# Altium PCB BAT_Simulator.PcbDoc
Units mm, origin at the board's own origin, x right, y up, seen from the top; angles counter-clockwise.
Board outline 95 x 100 mm, 2 copper layers (Top Layer, Bottom Layer); 23 components, 47 nets, 144 pads, 48 vias.
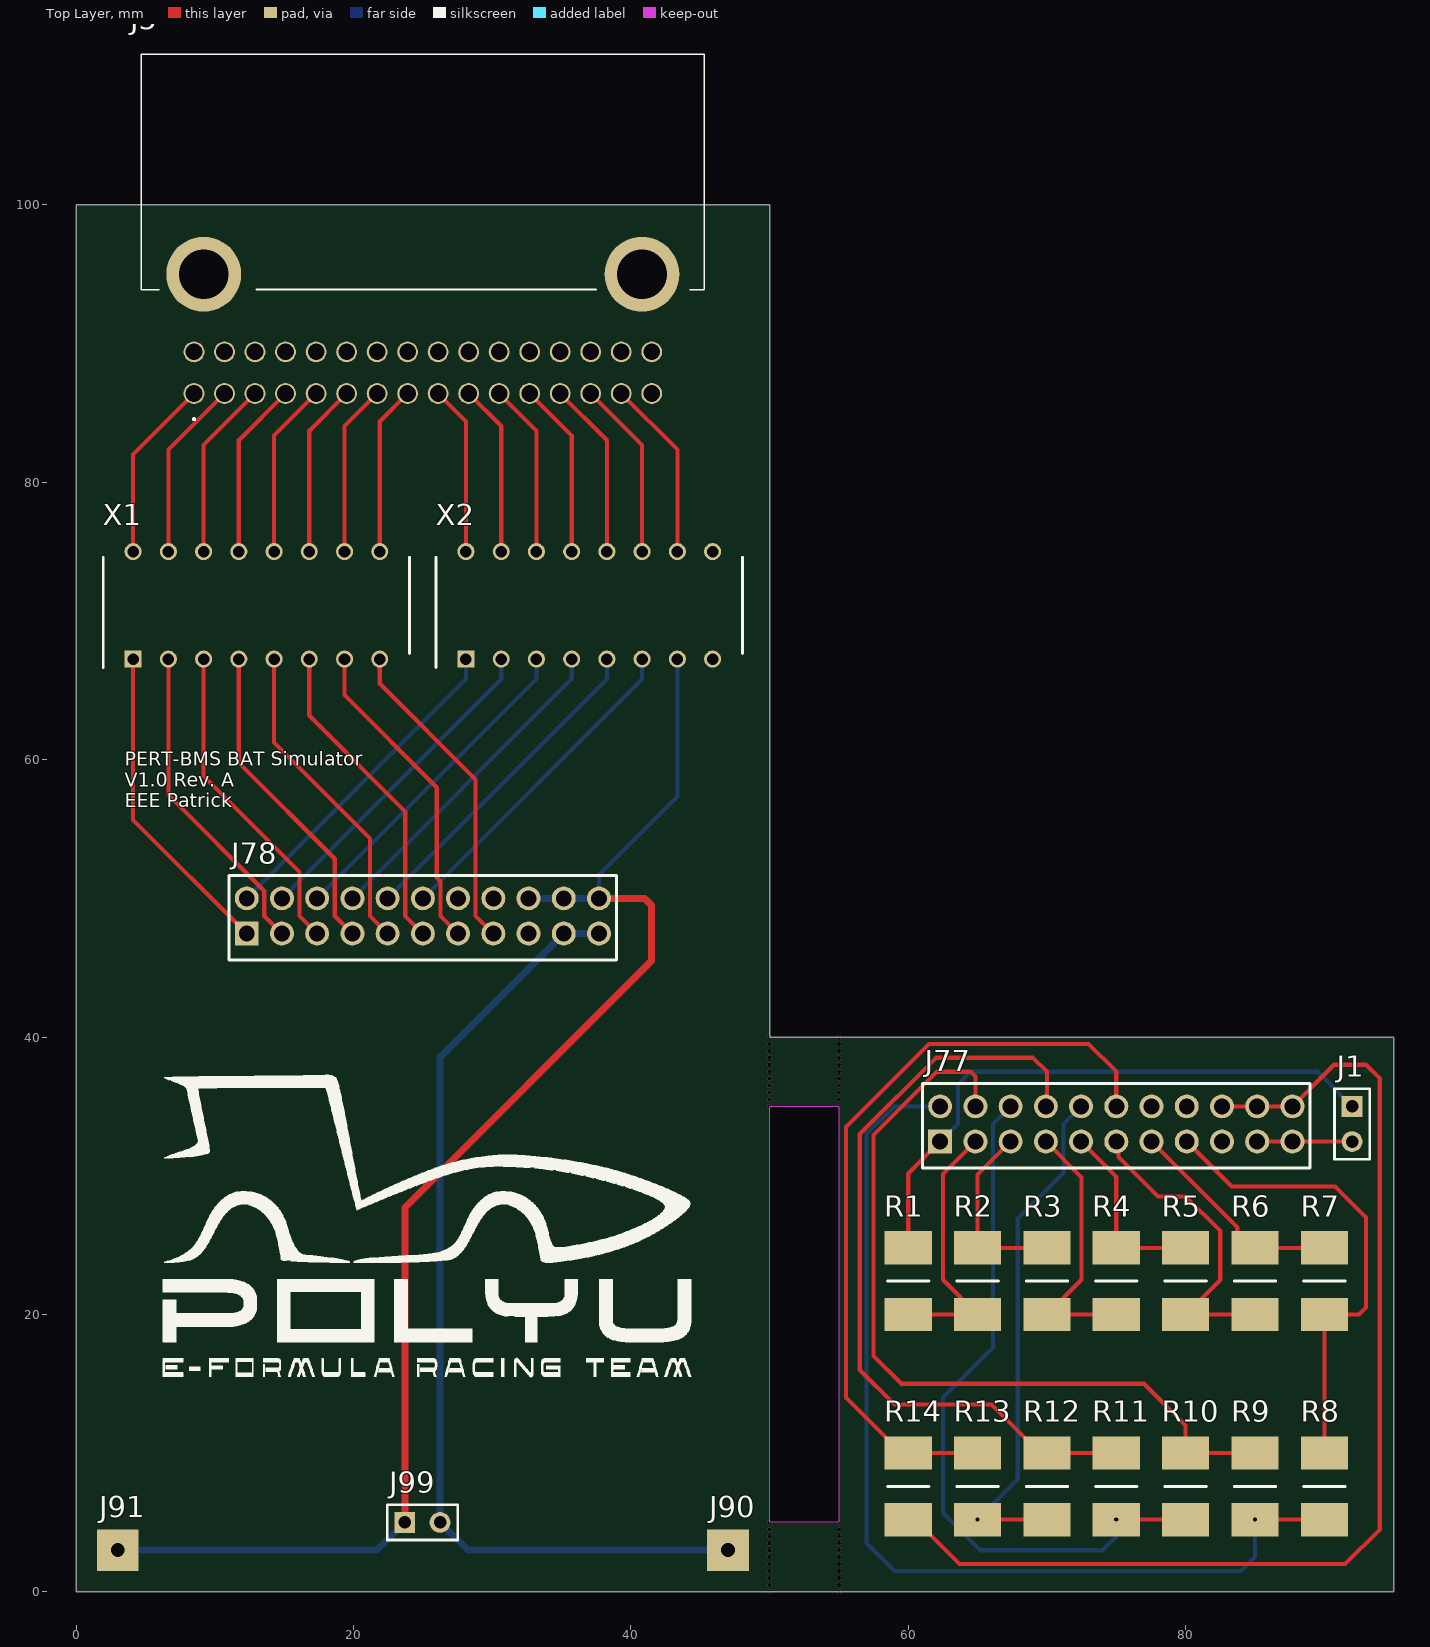
[diagram p0: Top Layer view]
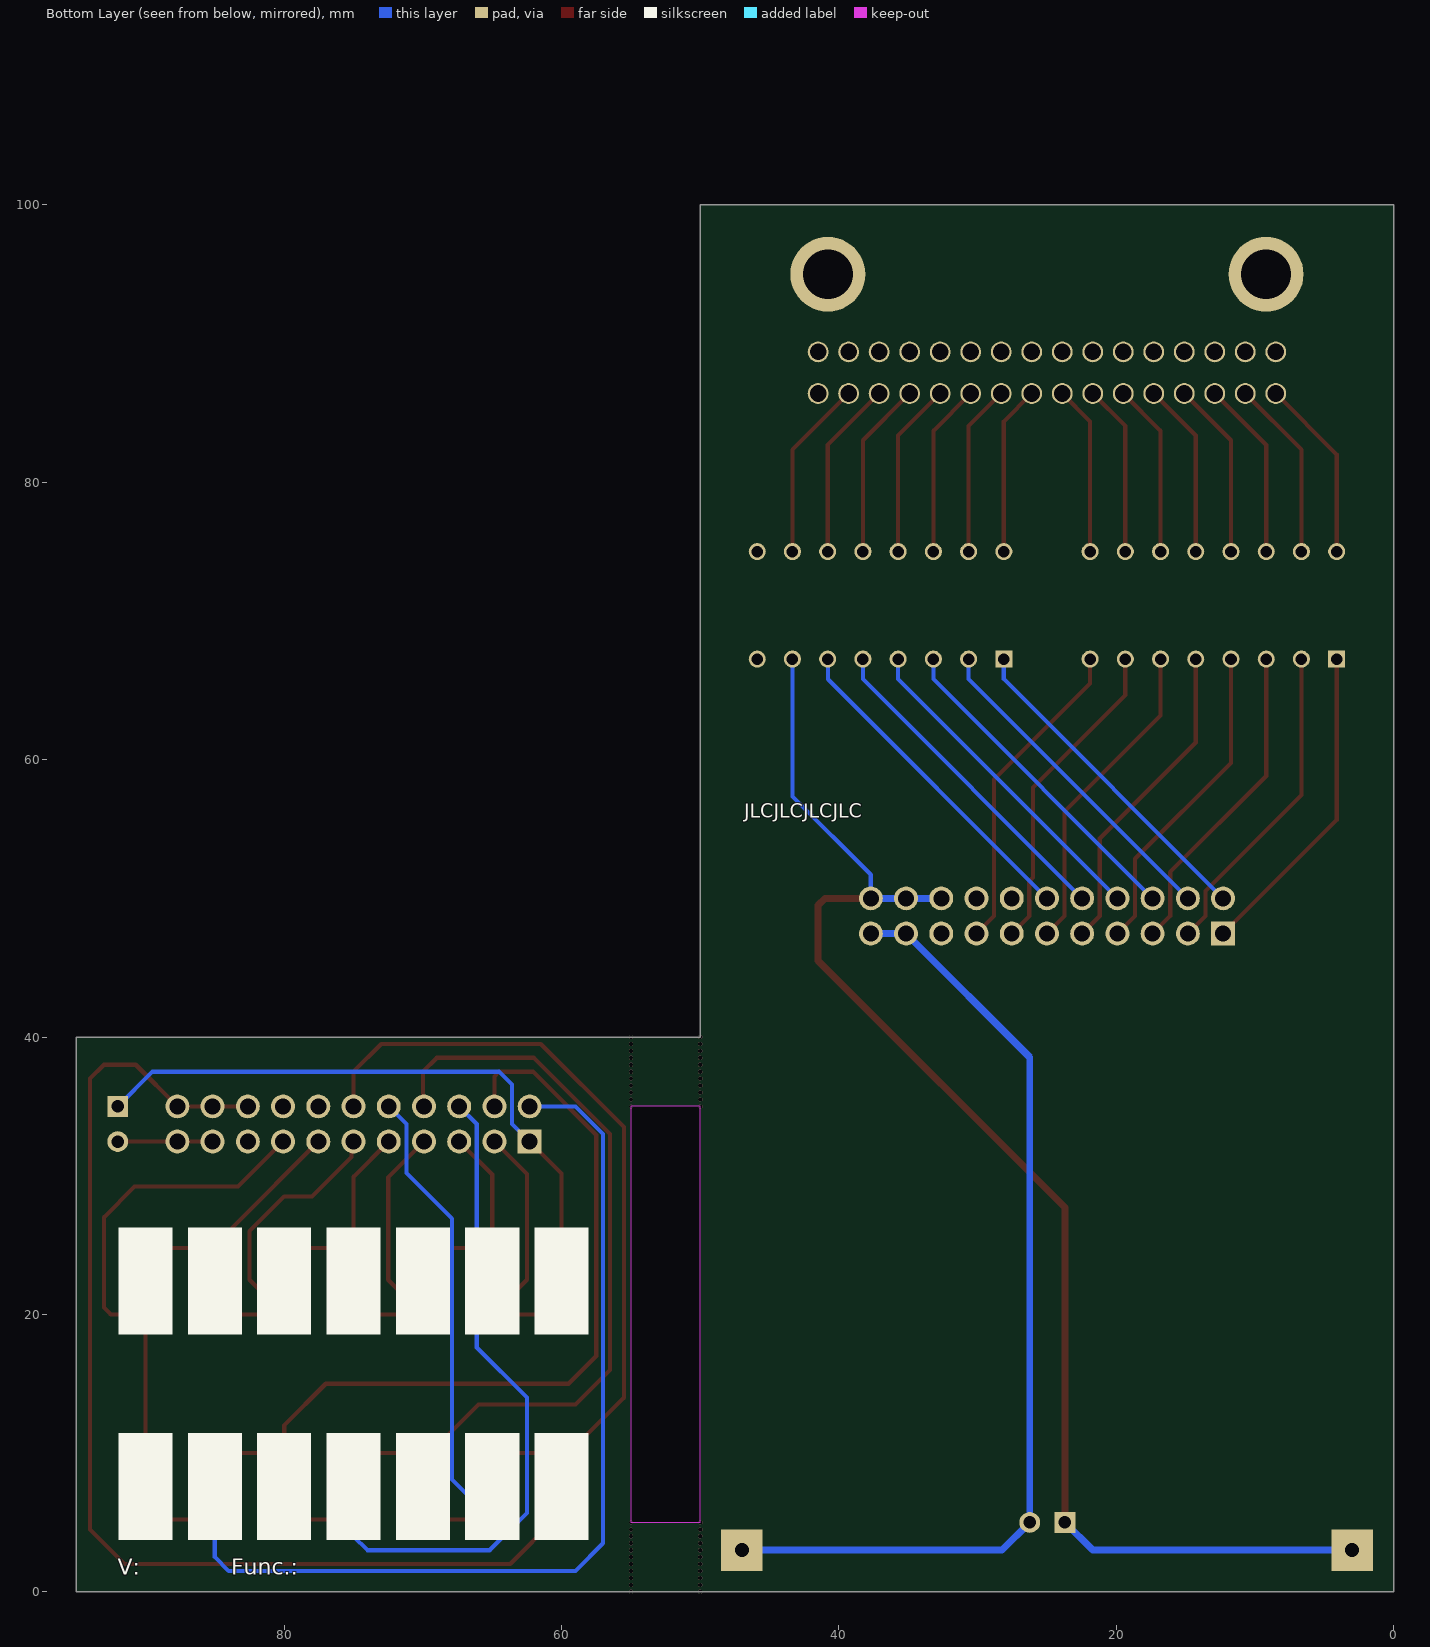
[diagram p1: Bottom Layer view, seen from below]
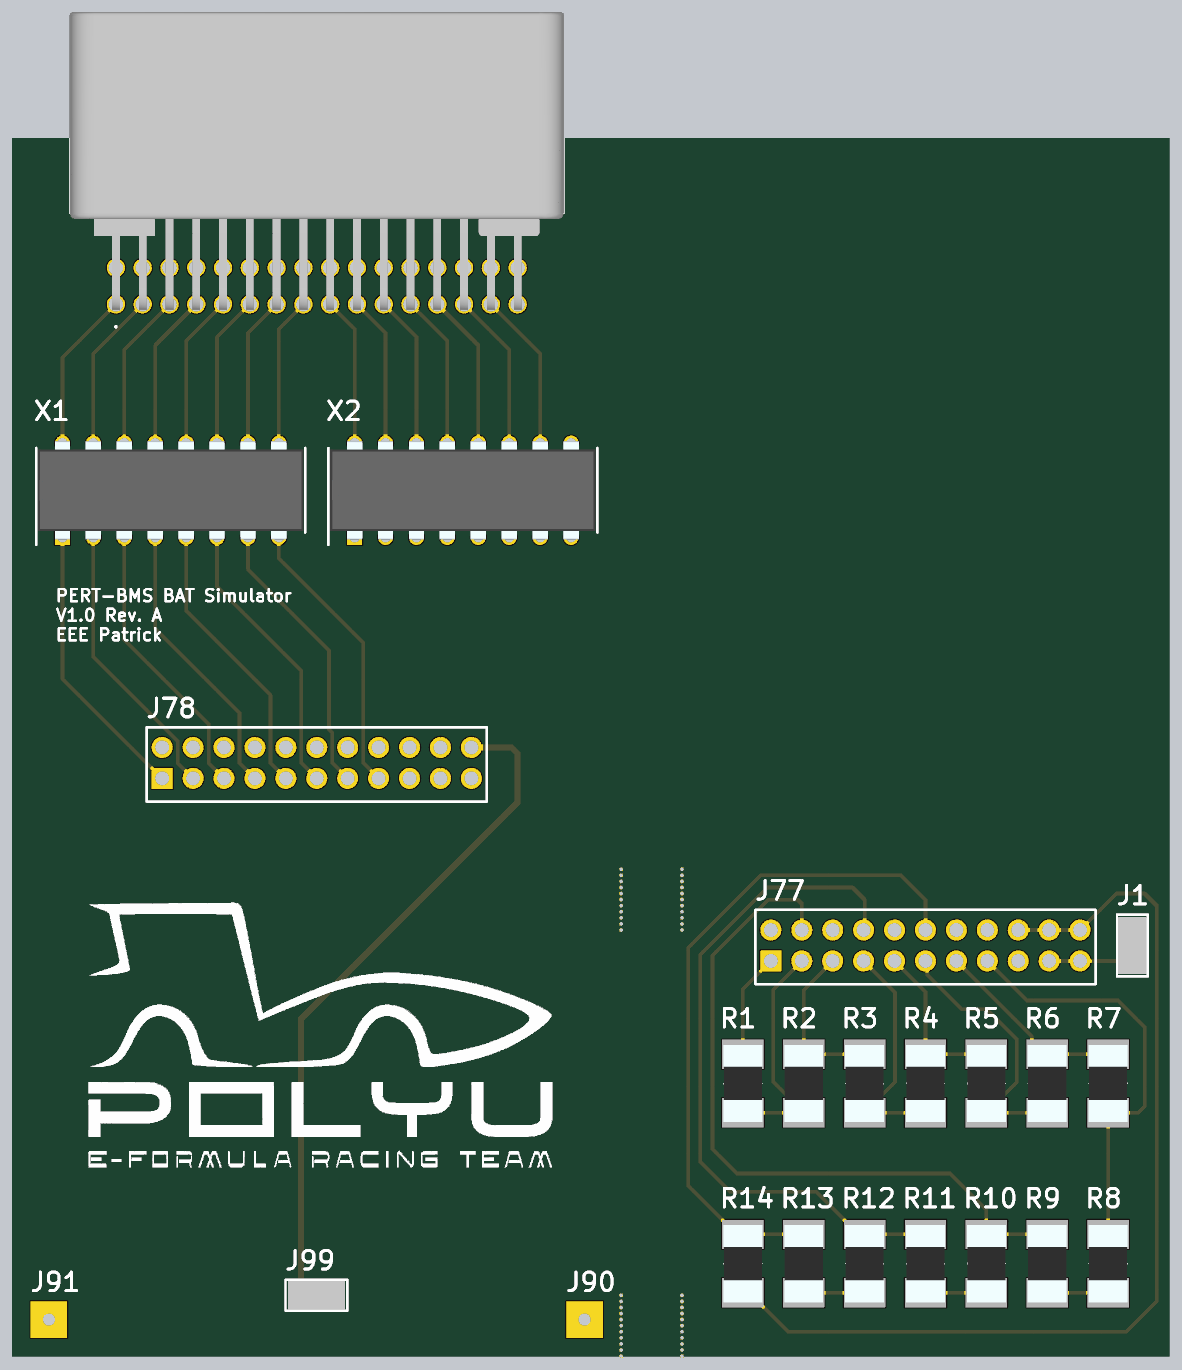
[diagram p2: 3D render of the assembled board from above, using the file's embedded part models]

## Layer stack, top to bottom
Top Solder: solder mask 0.0102, Solder Resist, Dk 3.5
Top Layer: signal copper 0.0356
Dielectric 1: dielectric 0.32, FR-4, Dk 4.8
Bottom Layer: signal copper 0.0356
Bottom Solder: solder mask 0.0102, Solder Resist, Dk 3.5

## Board outline
0,0 0,100 50,100 50,40 95,40 95,0
cut-out: 50,5 50,35 55,35 55,5

## Design rules (kind name [scope] priority, off if disabled: settings)
Clearance [All] p1: gap=0.254 ignorepadtopadclearanceinfootprint=FALSE except(0: Arc-Hole Track-Hole SMDPad-Hole THPad-Hole Via-Hole Fill-Hole Poly-Hole Region-Hole Text-Hole)
PolygonConnect [All] p1: connectstyle=Relief reliefconductorwidth=0.254 reliefentries=4 polygonreliefangle="90 Angle" airgapwidth=0.254
RoutingVias [All] p1: holewidth=0.711 width=1.27 viastyle="Through Hole" minholewidth=0.711 minwidth=1.27 maxholewidth=0.711 maxwidth=1.27
SolderMaskExpansion [All] p1: expansion=0.102 istentingtop=FALSE
Width [All] p1: maxlimit=1 minlimit=0.254 preferedwidth=0.254 minimp=50.000000 maximp=50.000000 favimp=50.000000
30 further rules are at their usual default settings.

## Components (designator, comment, footprint, x,y, rotation, side; value= is the part's Value field where it differs from the comment)
J1 "Short Plug" HDR_1X2_2.54_THD 92,35 r270 top
J5 "1318745-2" TH025_32P 8.5,86.4 r90 top
J77 "Header 1x5" HDR_2x11_2.54_THD 62.3,32.46 r90 top
J78 "Header 1x5" HDR_2x11_2.54_THD 12.3,47.46 r90 top
J90 "CastellatedHoles" CastellatedHole 47,3 r0 top
J91 "CastellatedHoles" CastellatedHole 3,3 r0 top
J99 "Header 1x2" HDR_1X2_2.54_THD 23.7,5 r0 top
R1 "100" 2512_SMD_R 60,22.4 r90 top
R2 "100" 2512_SMD_R 65,22.4 r90 top
R3 "100" 2512_SMD_R 70,22.4 r90 top
R4 "100" 2512_SMD_R 75,22.4 r90 top
R5 "100" 2512_SMD_R 80,22.4 r90 top
R6 "100" 2512_SMD_R 85,22.4 r90 top
R7 "100" 2512_SMD_R 90,22.4 r90 top
R8 "100" 2512_SMD_R 90,7.6 r270 top
R9 "100" 2512_SMD_R 85,7.6 r270 top
R10 "100" 2512_SMD_R 80,7.6 r270 top
R11 "100" 2512_SMD_R 75,7.6 r270 top
R12 "100" 2512_SMD_R 70,7.6 r270 top
R13 "100" 2512_SMD_R 65,7.6 r270 top
R14 "100" 2512_SMD_R 60,7.6 r270 top
X1 "210-8LPS" "DIP Switch 8Ch" 13,71.125 r90 top
X2 "210-8LPS" "DIP Switch 8Ch" 37,71.125 r90 top

## Footprints (in the part's own frame and the unit in brackets; to place one, negate y for a bottom-side part, rotate by r counter-clockwise, add the part's x,y. Pads: shape width x height; smd on the part's side, far side on the other; paste and mask are expansions set on the pad)
2512_SMD_R [mm]
  rect 2.4x3.4 smd: 1(-2.4,0) 2(2.4,0)
  silkscreen extent 0,-1.5 0,1.5, body extent -3.17,-1.6 3.17,1.6, height 1.2
CastellatedHole [mm]
  rect 3x3 / inner round 1.524 / far side rect 3x3 hole 1: 1(0,0)
"DIP Switch 8Ch" [mm]
  rect 1.23x1.23 / inner round 1.23 / far side rect 1.23x1.23 hole 0.83: 1(-3.875,8.89)
  round 1.23 hole 0.83: 2(-3.875,6.35) 3(-3.875,3.81) 4(-3.875,1.27) 5(-3.875,-1.27) 6(-3.875,-3.81) 7(-3.875,-6.35) 8(-3.875,-8.89) 9(3.875,-8.89) 10(3.875,-6.35) 11(3.875,-3.81) 12(3.875,-1.27) 13(3.875,1.27) 14(3.875,3.81) 15(3.875,6.35) 16(3.875,8.89)
  silkscreen extent -4.49,-11.04 3.47,11.04, body extent -4.03,-10.89 4.03,10.89, height 4.58
HDR_1X2_2.54_THD [mm] "Connector; Header; 2 Position"
  round 1.5 hole 0.9: 1(2.54,0)
  rect 1.5x1.5 hole 0.9: 2(0,0)
  silkscreen extent -1.27,-1.27 3.81,1.27, body extent -1.07,-1.17 3.61,1.17, height 10.38
HDR_2x11_2.54_THD [mm]
  rect 1.725x1.725 hole 1.15: 1(0,0)
  round 1.725 hole 1.15: 2(0,-2.54) 3(0,-5.08) 4(0,-7.62) 5(0,-10.16) 6(0,-12.7) 7(0,-15.24) 8(0,-17.78) 9(0,-20.32) 10(0,-22.86) 11(0,-25.4) 12(2.54,-25.4) 13(2.54,-22.86) 14(2.54,-20.32) 15(2.54,-17.78) 16(2.54,-15.24) 17(2.54,-12.7) 18(2.54,-10.16) 19(2.54,-7.62) 20(2.54,-5.08) 21(2.54,-2.54) 22(2.54,0)
  silkscreen extent -1.91,-26.67 4.19,1.27
TH025_32P [mm]
  round 1.5 hole 1.2: 1(0,0) 2(0,-2.2) 3(0,-4.4) 4(0,-6.6) 5(0,-8.8) 6(0,-11) 7(0,-13.2) 8(0,-15.4) 9(0,-17.6) 10(0,-19.8) 11(0,-22) 12(0,-24.2) 13(0,-26.4) 14(0,-28.6) 15(0,-30.8) 16(0,-33) 17(3,0) 18(3,-2.2) 19(3,-4.4) 20(3,-6.6) 21(3,-8.8) 22(3,-11) 23(3,-13.2) 24(3,-15.4) 25(3,-17.6) 26(3,-19.8) 27(3,-22) 28(3,-24.2) 29(3,-26.4) 30(3,-28.6) 31(3,-30.8) 32(3,-33)
  round 5.4 hole 3.6: MH1(8.6,-0.7) MH2(8.6,-32.3)
  silkscreen extent -1.9,-36.8 24.47,3.8, body extent -0.47,-36.8 24,3.8, height 15.6

## Part data
J1: library part Jumper, "Jumper for shorting two net"
J5: library part "TE TH/.25 32P TH", "TE CONNECTIVITY - 1318745-2 - Automotive Connector, TH 025 Series, Right Angle Plug, 32 Contacts, Crimp Pin", Manufacturer_Name="TE Connectivity", Mouser Part Number=571-1318745-2, Datasheet Link=https://www.te.com/commerce/DocumentDelivery/DDEController?Action=showdoc&DocId=Customer+Drawing%7F1318745%7FB6%7Fpdf%7FJapanese%7FJPN_CD_1318745_B6.pdf%7F1318745-2, Geometry.Height=15.5mm, Manufacturer_Part_Number=1318745-2, Mouser Price/Stock=https://www.mouser.co.uk/ProductDetail/TE-Connectivity-AMP/1318745-2?qs=ajJfoEgdyuQ%2FBs4LKkUxbA%3D%3D
J77 J78: library part "Header 2x11", "Header 2x11", Geometry.Height=10.745mm
J99: "Header, 2-Pin"
R1 R2 R3 R4 R5 R6 R7 R8 R9 R10 R11 R12 R13 R14: library part 2512_SMD_Resistor, "2512 SMD Resistor", Power Rating=3W, Tolerance=1%
X1 X2: library part "DIP Switch 8Ch", "DIP Switches / SIP Switches THROUGH HOLE, GOLD FLASH DIP SWITCH, 8-POLE, LOW PROFILE ACTUATOR, BOTTOM SEAL, TUBE PACK", Manufacturer_Name=CTS, Datasheet Link=https://datasheet.datasheetarchive.com/originals/dk/DKDS-29/575295.pdf, Geometry.Height=4.58mm, Manufacturer_Part_Number=210-8LPS

## Via types
v1: diameter 0.3, hole 0.3, Top Layer to Bottom Layer, 45 vias
v2: diameter 0.5, hole 0.3, Top Layer to Bottom Layer, tented both sides, 3 vias

## Nets (pads, with @x,y where several pads share a name; then routed paths per layer and width w, separated by ;. In a path a pad name is that pad's centre, name@x,y a point inside that pad or via, vN(x,y) a via of type N, cw(c..) or ccw(c..) an arc to the next point about the centre after c; other vN are vias at no path point)
GND: J77.12 J77.13 J77.14 R14.2 | length 81.9
  Top Layer w0.3: R14.2 60.5,5.2 63.7,2 91.5,2 94,4.5 94,37 93,38 90.7,38 J77.12 J77.13 J77.14
M0: J78.1 X1.1 | length 23.2
  Top Layer w0.3: X1.1 4.11,55.65 J78.1
M1: J78.2 X1.2 | length 23.2
  Top Layer w0.3: X1.2 6.65,57.441 13.567,50.525 13.567,48.733 J78.2
M2: J78.3 X1.3 | length 23.2
  Top Layer w0.3: X1.3 9.19,58.81 16.114,51.887 16.114,48.726 J78.3
M3: J78.4 X1.4 | length 23.2
  Top Layer w0.3: X1.4 11.73,59.77 18.647,52.854 18.647,48.733 J78.4
M4: J78.5 X1.5 | length 23.2
  Top Layer w0.3: X1.5 14.27,61.23 21.194,54.307 21.194,48.726 J78.5
M5: J78.6 X1.6 | length 23.2
  Top Layer w0.3: X1.6 16.81,63.19 23.727,56.274 23.727,48.733 J78.6
M6: J78.7 X1.7 | length 23.2
  Top Layer w0.3: X1.7 19.35,64.65 26,58 26,51.5 26.274,51.226 26.274,48.726 J78.7
M7: J78.8 X1.8 | length 23.2
  Top Layer w0.3: X1.8 21.89,65.493 28.807,58.577 28.807,48.733 J78.8
M8: J78.22 X2.1 | length 23.8
  Bottom Layer w0.3: J78.22 28.11,65.81 X2.1
M9: J78.21 X2.2 | length 23.8
  Bottom Layer w0.3: J78.21 30.65,65.81 X2.2
M10: J78.20 X2.3 | length 23.8
  Bottom Layer w0.3: J78.20 33.19,65.81 X2.3
M11: J78.19 X2.4 | length 23.8
  Bottom Layer w0.3: J78.19 35.73,65.81 X2.4
M12: J78.18 X2.5 | length 23.8
  Bottom Layer w0.3: J78.18 38.27,65.81 X2.5
M13: J78.17 X2.6 | length 23.8
  Bottom Layer w0.3: J78.17 40.799,65.799 40.799,67.239 X2.6
MGND: J78.12 J78.13 J78.14 J91.1 J99.2 X2.7 | length 102.1
  Top Layer w0.5: J99.2 23.7,27.7 41.5,45.5 41.5,49.5 41,50 J78.12
  Bottom Layer w0.3: J78.12 37.7,51.7 43.35,57.35 X2.7
  Bottom Layer w0.5: J91.1 21.7,3 J99.2 ; J78.14 J78.13 J78.12
N0: J1.2 J77.1 R1.2 | length 43.1
  Top Layer w0.3: R1.2 60,30.16 J77.1
  Bottom Layer w0.3: J77.1 63.573,33.734 63.573,36.574 64.5,37.5 89.5,37.5 J1.2
N1: J77.2 R1.1 R2.1 | length 19.5
  Top Layer w0.3: R1.1 R2.1 62.5,22.5 62.5,30.12 J77.2
N2: J77.3 R2.2 R3.2 | length 13.6
  Top Layer w0.3: J77.3 65,30.08 R2.2 R3.2
N3: J77.4 R3.1 R4.1 | length 19.6
  Top Layer w0.3: J77.4 72.5,29.88 72.5,22.5 R3.1 R4.1
N4: J77.5 R4.2 R5.2 | length 13.7
  Top Layer w0.3: J77.5 75,29.92 R4.2 R5.2
N5: J77.6 R5.1 R6.1 | length 22.8
  Top Layer w0.3: J77.6 75.148,32.312 75.148,31.352 78,28.5 80,28.5 82.5,26 82.5,22.5 R5.1 R6.1
N6: J77.7 R6.2 R7.2 | length 15.9
  Top Layer w0.3: J77.7 83.726,26.274 83.726,25.85 84.776,24.8 R7.2
N7: J77.8 R7.1 R8.1 | length 34.9
  Top Layer w0.3: J77.8 83.323,29.217 90.783,29.217 93,27 93,20.5 92.5,20 R7.1 R8.1
N8: J77.22 R8.2 R9.2 | length 72.6
  Top Layer w0.3: v2(85,5.2) R8.2
  Bottom Layer w0.3: J77.22 59,35 57,33 57,3.5 59,1.5 84,1.5 85,2.5 v2(85,5.2)
N9: J77.21 R9.1 R10.1 | length 59
  Top Layer w0.3: J77.21 64.84,37.16 64.5,37.5 62.066,37.5 57.5,32.934 57.5,17 59.5,15 77,15 80,12 R10.1 R9.1
N10: J77.20 R10.2 R11.2 | length 51.6
  Top Layer w0.3: v2(75,5.2) R10.2
  Bottom Layer w0.3: J77.20 66.113,33.734 66.113,17.614 62.5,14 62.5,5.676 65.176,3 74,3 75,4 v2(75,5.2)
N11: J77.19 R11.1 R12.1 | length 56.7
  Top Layer w0.3: J77.19 70,35.08 70,37.5 69,38.5 62,38.5 56.5,33 56.5,16 59,13.5 66,13.5 69.5,10 R12.1 R11.1
N12: J77.18 R12.2 R13.2 | length 37.9
  Top Layer w0.3: v2(65,5.2) R12.2
  Bottom Layer w0.3: v2(65,5.2) 67.89,8.09 67.89,26.902 71.186,30.198 71.186,33.727 J77.18
N13: J77.17 R13.1 R14.1 | length 56
  Top Layer w0.3: R13.1 R14.1 59.5,10 55.504,13.996 55.504,33.504 61.5,39.5 73,39.5 75,37.5 J77.17
NetJ5_1: J5.1 X1.16 | length 13.2
  Top Layer w0.3: X1.16 4.11,82.01 J5.1
NetJ5_2: J5.2 X1.15 | length 13.1
  Top Layer w0.3: X1.15 6.65,82.35 J5.2
NetJ5_3: J5.3 X1.14 | length 12.9
  Top Layer w0.3: X1.14 9.19,82.69 J5.3
NetJ5_4: J5.4 X1.13 | length 12.8
  Top Layer w0.3: X1.13 11.73,83.03 J5.4
NetJ5_5: J5.5 X1.12 | length 12.7
  Top Layer w0.3: X1.12 14.27,83.37 J5.5
NetJ5_6: J5.6 X1.11 | length 12.5
  Top Layer w0.3: X1.11 16.81,83.71 J5.6
NetJ5_7: J5.7 X1.10 | length 12.4
  Top Layer w0.3: X1.10 19.35,84.05 J5.7
NetJ5_8: J5.8 X1.9 | length 12.2
  Top Layer w0.3: X1.9 21.89,84.39 J5.8
NetJ5_9: J5.9 X2.16 | length 12.2
  Top Layer w0.3: J5.9 28.11,84.39 X2.16
NetJ5_10: J5.10 X2.15 | length 12.4
  Top Layer w0.3: J5.10 30.65,84.05 X2.15
NetJ5_11: J5.11 X2.14 | length 12.5
  Top Layer w0.3: J5.11 33.19,83.71 X2.14
NetJ5_12: J5.12 X2.13 | length 12.7
  Top Layer w0.3: J5.12 35.73,83.37 X2.13
NetJ5_13: J5.13 X2.12 | length 12.8
  Top Layer w0.3: J5.13 38.27,83.03 X2.12
NetJ5_14: J5.14 X2.11 | length 12.9
  Top Layer w0.3: J5.14 40.81,82.69 X2.11
NetJ5_15: J5.15 X2.10 | length 13.1
  Top Layer w0.3: J5.15 43.35,82.35 X2.10
VCC: J78.10 J78.11 J90.1 J99.1 | length 70.3
  Bottom Layer w0.5: J78.11 J78.10 26.24,38.54 J99.1 28.24,3 J90.1
VDD: J1.1 J77.10 J77.11 | length 6.8
  Top Layer w0.3: J77.10 J77.11 J1.1
pads on no net: J5.16 J5.17 J5.18 J5.19 J5.20 J5.21 J5.22 J5.23 J5.24 J5.25 J5.26 J5.27 J5.28 J5.29 J5.30 J5.31 J5.32 J5.MH1 J5.MH2 J77.9 J77.15 J77.16 J78.9 J78.15 J78.16 X2.8 X2.9
copper on no net:
  other v1: 50,0 55,0 50,0.5 55,0.5 50,1 55,1 50,1.5 55,1.5 50,2 55,2 50,2.5 55,2.5 50,3 55,3 50,3.5 55,3.5 50,4 55,4 50,4.5 55,4.5 50,5 55,5 50,35 55,35 50,35.5 55,35.5 50,36 55,36 50,36.5 55,36.5 50,37 55,37 55,37 50,37.5 55,37.5 50,38 55,38 50,38.5 55,38.5 50,39 55,39 50,39.5 55,39.5 50,40 55,40

## Silkscreen, mask and mechanical layers (free items; w line width, h text height)
Top Overlay:
  drawing of 30 lines, arcs and shapes, not listed
  text "PERT-BMS BAT Simulator / V1.0 Rev. A / EEE Patrick" at 3.5,56.561 h1
Bottom Overlay:
  rectangle: 88.05,3.75 91.95,11.45
  rectangle: 83.05,3.75 86.95,11.45
  rectangle: 78.05,3.75 81.95,11.45
  rectangle: 73.05,3.75 76.95,11.45
  rectangle: 68.05,3.75 71.95,11.45
  rectangle: 63.05,3.75 66.95,11.45
  rectangle: 58.05,3.75 61.95,11.45
  rectangle: 58.05,18.55 61.95,26.25
  rectangle: 63.05,18.55 66.95,26.25
  rectangle: 68.05,18.55 71.95,26.25
  rectangle: 73.05,18.55 76.95,26.25
  rectangle: 78.05,18.55 81.95,26.25
  rectangle: 83.05,18.55 86.95,26.25
  rectangle: 88.05,18.55 91.95,26.25
  text "JLCJLCJLCJLC" at 46.831,55.8 h1
  text "V:             Func.:" at 92,0.835 h2
BoardShape:
  lines w0.1: 0,45 50,45 ; 50,0 50,40 ; 55,0 55,40 ; 50,40 95,40 95,0 0,0 0,100 50,100 50,40 ; 50,5 55,5 55,35 50,35 50,5
Stack:
  lines w0.1: 40,55 45,55 ; 45,55 45,15 5,15 5,55 45,55